# Altium PCB Vesta_cape.PcbDoc (part 2 of 2)
Units mm, origin at the board's own origin, x right, y up, seen from the top; angles counter-clockwise.
Board outline 180 x 109.5 mm, 4 copper layers (Component Side, Ground Plane, Power Plane, Solder Side), stack 1.602 mm thick; 135 components, 158 nets, 582 pads, 796 vias.
Unrouted connection lines stored in the file: 10.
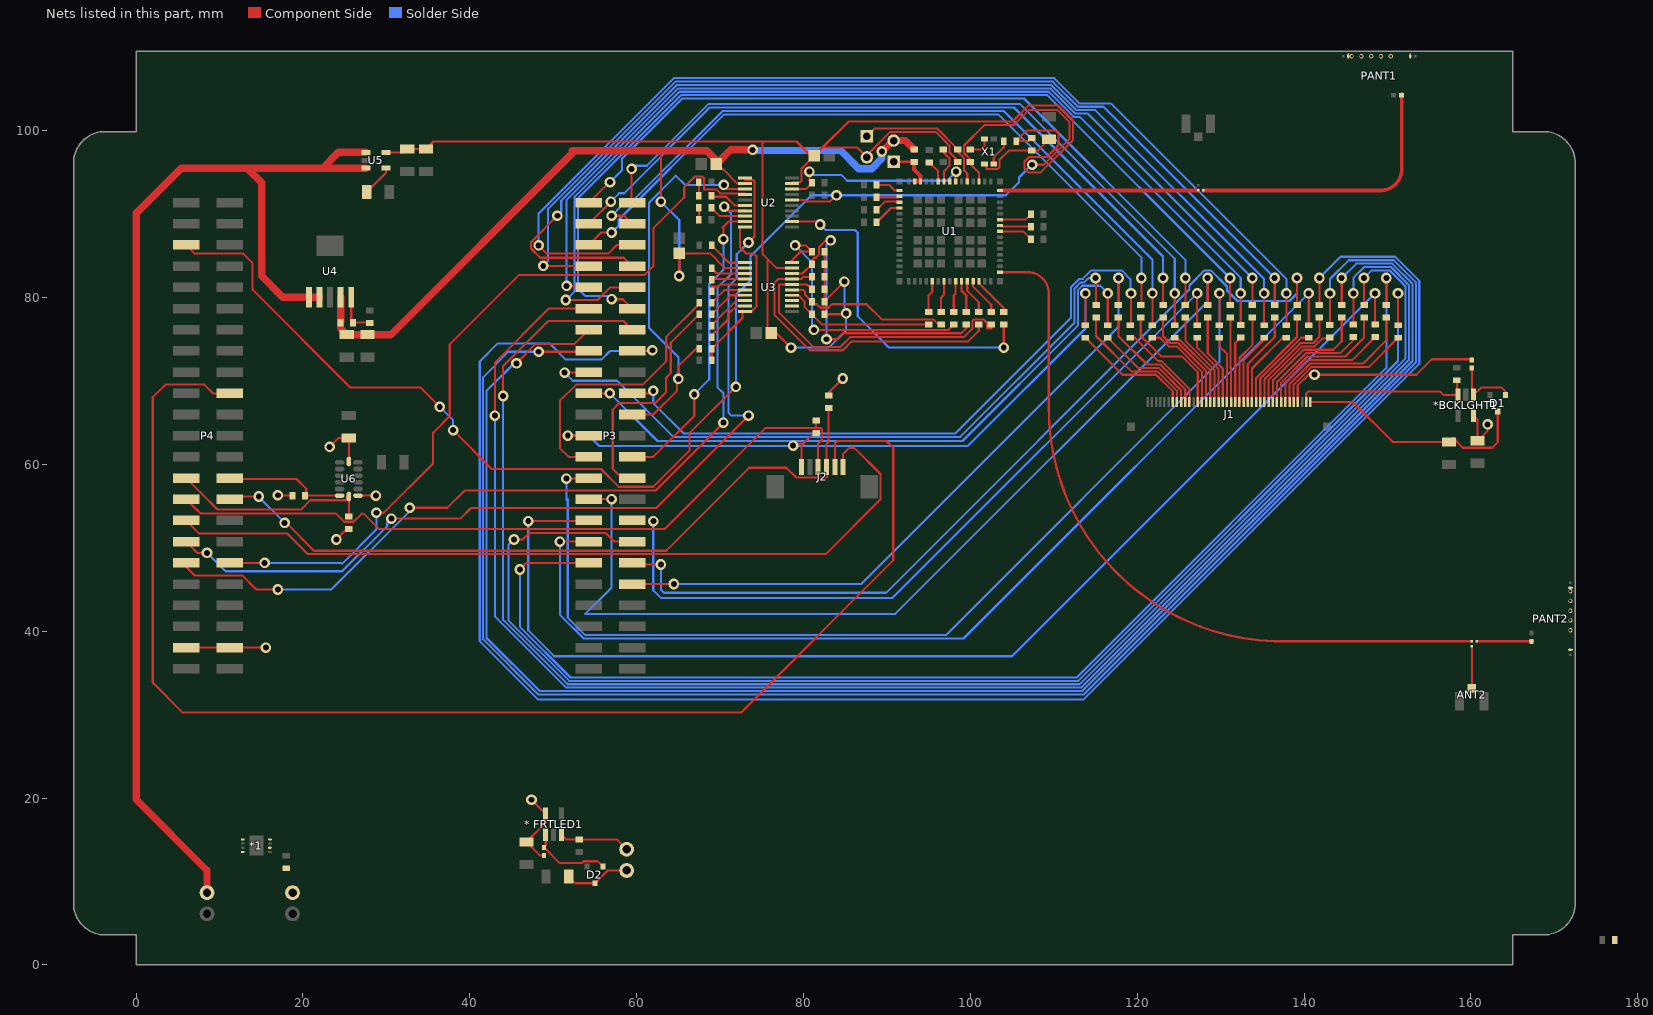
[diagram p4: the nets of this part, all layers, seen from the top]

## Via types
v1: diameter 1.25, hole 0.7, Component Side to Ground Plane, 660 vias
v2: diameter 1.27, hole 0.711, Component Side to Solder Side, 101 vias
v3: diameter 1.27, hole 0.711, Component Side to Ground Plane, 14 vias
v4: diameter 1.27, hole 0.711, Component Side to Power Plane, 10 vias
v5: diameter 0.5, hole 0.3, Component Side to Solder Side, 10 vias
v6: diameter 1.27, hole 0.711, Component Side to Solder Side, tented bottom, 1 vias

## Nets (pads, with @x,y where several pads share a name; then routed paths per layer and width w, separated by ;. In a path a pad name is that pad's centre, name@x,y a point inside that pad or via, vN(x,y) a via of type N, cw(c..) or ccw(c..) an arc to the next point about the centre after c; other vN are vias at no path point) (continued)
GPIO1_12: P4.12 U2.4 | length 94.7
  Component Side w0.254: P4.12@11.205,48.2 v2(15.4,48.2) ; v2(28.8,54.2) 29.7,54.2 35.6,60.1 35.6,63.8 37.6,65.8 37.6,74.393 45.925,82.719 60.976,82.719 62,83.742 62,88.3 65.7,92 65.7,93.245 66.984,94.529 67.916,94.529 68.079,94.366 68.079,92.954 68.104,92.929 69.579,92.929 70.017,92.492 73,92.492 U2.4@73,92.35
  Solder Side w0.254: v2(15.4,48.2) 24.6,48.2 24.7,48.1 28.8,52.2 v2(28.8,54.2)
GPIO1_29: P3.26 R43.1 U2.3 | length 49.2
  Component Side w0.254: P3.26@59.465,65.98 61.98,65.98 64.844,68.844 64.844,70.094 v2(65,70.25) 65,71.77 67.105,73.875 R43.1@67.5,73.875 ; v2@70.454,93.654 v2(70.454,93.497) 70.951,93 U2.3@73,93
  Solder Side w0.254: v2(65,70.25) 65,70.75 65,72.865 61.48,76.385 61.48,91.38 64.7,94.6 65.803,93.497 v2(70.454,93.497)
GPIO1_30: P3.21 R39.1 | length 32.9
  Component Side w0.254: P3.21@54.16,61 P3.21@54.26,60.9 51.85,60.9 50.8,61.95 50.8,67.613 52.749,69.561 60.732,69.561 63.548,72.377 63.548,75.28 R39.1@67.5,79.233
GPIO1_31: P3.20 R40.1 | length 28.2
  Component Side w0.254: P3.20@59.465,58.36 58.221,58.36 57.131,59.45 57.131,66.562 57.922,67.353 62.244,67.353 63.518,68.627 63.518,70.362 64.09,70.935 64.09,74.59 R40.1@67.5,78
I2C1_SCL_TOUCH: J2.3 P4.17 R80.1 | length 89.2
  Component Side w0.254: P4.17@6,55.82 7.284,54.536 7.297,54.536 7.703,54.129 23.925,54.129 24.934,53.121 26.066,53.121 27.045,54.1 27.27,54.1 29.131,52.239 63.339,52.239 75.479,64.379 81.5,64.379 ; R80.1@81.5,65.25 81.5,64.379 ; J2.3@81.75,59.675 81.75,62.5 82.229,62.979 82.229,64.216 82.066,64.379 81.5,64.379
I2C1_SDA_TOUCH: J2.4 P4.18 R79.1 | length 87.2
  Component Side w0.254: P4.18@11.43,56.045 11.538,56.152 v2(14.7,56.152) ; v2(17.8,53) 17.981,53 21.334,49.648 63.548,49.648 73.5,59.6 77.946,59.6 79.1,58.446 82.781,58.446 82.836,58.5 J2.4@82.836,59.675 ; J2.4@82.75,59.675 82.75,62.414 83,62.664 R79.1@83,66.75
  Solder Side w0.254: v2(14.7,56.152) 14.7,56.1 v2(17.8,53)
I2C2_SCL_ACC: P4.19 R77.1 U6.14 | length 24.4
  Component Side w0.254: P4.19@6,58.36 7.691,56.669 7.703,56.669 7.867,56.506 7.867,56.493 9.766,54.594 19.789,54.594 20.891,55.696 25.254,55.696 25.254,56.152 U6.14@25.5,56.152 R77.1@25.5,53.75
I2C2_SDA_ACC: P4.20 R76.1 U6.13 | length 14.8
  Component Side w0.254: P4.20@11.205,58.36 11.205,58.244 19.236,58.244 20.4,57.08 20.4,56.4 R76.1@20.25,56.25 U6.13@24.403,56.25
LCD_DATA0: P3.45 R66.1 | length 91
  Component Side w0.254: P3.45@54.26,91.38 56.712,93.832 v2(56.8,93.832) ; R66.1@125.769,79.097 v2(125.769,82.342) v2@125.769,82.481
  Solder Side w0.254: v2(56.8,93.832) 58.239,95.271 58.239,96.617 65.475,103.853 106.433,103.853 125.769,84.517 v2(125.769,82.342)
LCD_DATA1: P3.46 R67.1 | length 88
  Component Side w0.254: v2(59.4,95.427) 59.4,91.445 P3.46@59.465,91.38 ; R67.1@124.496,76.684 v2(124.496,80.504)
  Solder Side w0.254: v2(59.4,95.427) 59.773,95.8 61.22,95.8 68.597,103.177 105.968,103.177 124.496,84.648 v2(124.496,80.504)
LCD_DATA2: P3.43 R68.1 | length 87.8
  Component Side w0.254: P3.43@54.26,88.84 54.26,88.86 55.931,90.531 55.963,90.531 56.9,91.467 v2(56.9,91.5) ; R68.1@123.092,79.097 v2(123.092,82.342)
  Solder Side w0.254: v2(56.9,91.5) 57.9,92.5 58.495,92.5 68.765,102.77 105.233,102.77 123.092,84.911 v2(123.092,82.342)
LCD_DATA3: P3.44 R69.1 | length 87.6
  Component Side w0.254: v2(57,89.8) 58.505,89.8 P3.44@59.465,88.84 ; R69.1@121.82,76.684 v2@121.82,79.93
  Solder Side w0.254: v2(57,89.8) 58.24,91.04 59,91.04 70.324,102.364 103.996,102.364 121.821,84.54 v2(121.82,80.504)
LCD_DATA4: P3.41 R70.1 | length 86.1
  Component Side w0.254: P3.41@54.26,86.3 55.76,87.8 v2(57,87.8) ; R70.1@120.416,79.097 120.5,79.181 v2(120.5,82.342) v2@120.5,82.5
  Solder Side w0.254: v2(57,87.8) 57.824,88.624 57.824,89.289 70.492,101.958 103.353,101.958 120.5,84.811 v2(120.5,82.342)
LCD_DATA5: P3.42 R57.1 | length 127.6
  Component Side w0.254: v2(48.25,86.25) 49.241,85.259 56.579,85.259 57.62,86.3 P3.42@59.465,86.3 ; R57.1@137.877,76.684 v2@137.877,80.373
  Solder Side w0.254: v2(48.25,86.25) 48.25,90.076 64.465,106.291 110.048,106.291 113.061,103.278 116.834,103.278 137.877,82.235 v2(137.877,80.504)
LCD_DATA6: P3.39 R58.1 | length 119.1
  Component Side w0.254: v2(48.8,83.8) 54.162,83.8 54.231,83.731 P3.39@54.26,83.76 ; R58.1@136.476,79.097 v2(136.476,82.342) v2@136.476,82.476
  Solder Side w0.254: v2(48.8,83.8) 49.394,84.394 49.394,90.645 64.634,105.885 109.879,105.885 112.893,102.871 115.947,102.871 v2(136.476,82.342)
LCD_DATA7: P3.40 R59.1 | length 125.1
  Component Side w0.254: v2(50.5,89.8) 47.336,86.636 47.336,85.871 48.436,84.771 58.454,84.771 P3.40@59.465,83.76 ; R59.1@135.201,76.684 v2@135.201,80.201
  Solder Side w0.254: v2(50.5,89.8) 50.962,90.262 50.962,91.638 64.802,105.478 109.711,105.478 112.724,102.465 114.97,102.465 135.201,82.234 v2(135.201,80.504)
LCD_DATA8: P3.37 R60.1 | length 113.5
  Component Side w0.254: v2(51.6,81.4) 54.08,81.4 P3.37@54.26,81.22 ; R60.1@133.799,79.097 v2(133.799,82.342) v2@133.799,82.451
  Solder Side w0.254: v2(51.6,81.4) 51.6,91.701 64.97,105.072 109.543,105.072 112.556,102.058 114.083,102.058 v2(133.799,82.342)
LCD_DATA9: P3.38 R61.1 | length 121
  Component Side w0.254: v2(51.5,79.7) 55.305,79.7 56.825,81.22 P3.38@59.465,81.22 ; R61.1@132.4,76.7 v2@132.4,80.1
  Solder Side w0.254: v2(51.5,79.7) 52.558,80.758 52.558,92.085 65.139,104.665 109.374,104.665 112.388,101.652 113.106,101.652 132.4,82.358 v2(132.4,80.504)
LCD_DATA10: P3.36 R62.1 | length 114
  Component Side w0.254: v2(57,79.8) 58.345,79.8 P3.36@59.465,78.68 ; R62.1@131.123,79.097 v2(131.123,82.342) v2@131.123,82.377
  Solder Side w0.254: v2(57,79.8) 56.621,80.179 53.829,80.179 52.965,81.043 52.965,91.917 65.307,104.259 109.206,104.259 v2(131.123,82.342)
LCD_DATA11: P3.34 R50.1 | length 194.3
  Component Side w0.254: v2(44,68.2) 44,71.8 49.381,77.181 58.424,77.181 P3.34@59.465,76.14 ; R50.1@147.183,79.097 v2(147.183,82.342) v2@147.183,82.567
  Solder Side w0.254: v2(44,68.2) 44,41.382 51.736,33.646 113.09,33.646 152.171,72.727 152.171,81.324 150.239,83.257 148.098,83.257 v2(147.183,82.342)
LCD_DATA12: P3.35 R51.1 | length 196.3
  Component Side w0.254: v2(43,65.852) 43,72.2 49.48,78.68 P3.35@54.26,78.68 ; R51.1@145.9,76.75 v2@145.9,80.35
  Solder Side w0.254: v2(43,65.852) 43,41.807 51.568,33.239 113.259,33.239 152.578,72.558 152.578,81.492 150.407,83.663 147.211,83.663 145.9,82.352 v2(145.9,80.504)
LCD_DATA13: P3.33 R52.1 | length 197.8
  Component Side w0.254: v2(45.596,72.101) 45.596,72.139 47.906,74.449 52.569,74.449 P3.33@54.26,76.14 ; R52.1@144.506,79.097 v2(144.506,82.342) v2@144.506,82.494
  Solder Side w0.254: v2(45.596,72.101) 45.293,72.101 42,68.808 42,39.2 48.367,32.833 113.427,32.833 152.984,72.39 152.984,81.661 150.575,84.07 146.234,84.07 v2(144.506,82.342)
LCD_DATA14: P3.31 R53.1 | length 203.8
  Component Side w0.254: v2(48.25,73.5) 54.16,73.5 P3.31@54.26,73.6 ; R53.1@143.1,76.7 v2@143.1,80.4
  Solder Side w0.254: v2(48.25,73.5) 44.628,73.5 41.594,70.465 41.594,39.032 48.199,32.427 113.595,32.427 153.391,72.222 153.391,81.829 150.744,84.476 145.347,84.476 143.1,82.229 v2(143.1,80.504)
LCD_DATA15: P3.32 R54.1 | length 218.5
  Component Side w0.254: P3.32@59.465,73.6 61.803,73.6 v2(61.882,73.679) ; R54.1@141.83,79.097 v2(141.83,82.342) v2@141.83,82.42
  Solder Side w0.254: v2(61.882,73.679) 61.803,73.6 56.8,73.6 55.759,72.559 51.498,72.559 49.557,74.5 43.35,74.5 41.187,72.337 41.187,38.813 48.2,31.8 113.544,31.8 153.797,72.053 153.797,81.997 150.912,84.882 144.37,84.882 v2(141.83,82.342)
LCD_DATA16: P3.15 R49.1 | length 145
  Component Side w0.254: v2(47.006,53.2) 54.08,53.2 54.18,53.3 54.23,53.25 P3.15@54.26,53.28 ; R49.1@148.5,76.75 v2@148.5,80.5
  Solder Side w0.254: v2(47.006,53.2) 47.006,40.1 50.108,36.999 104.995,36.999 v2(148.5,80.504)
LCD_DATA17: P3.16 R65.1 | length 92.6
  Component Side w0.254: R65.1@127.172,76.684 v2@127.172,80.328
  Solder Side w0.254: v2(62,53.2) 61.986,53.186 61.986,44.914 62.9,44 90.669,44 v2(127.172,80.504)
LCD_DATA18: P3.11 R48.1 | length 151.4
  Component Side w0.254: v2(46,47.4) 46.8,48.2 P3.11@54.16,48.2 ; R48.1@149.86,79.097 v2(149.86,82.342) v2@149.86,82.39 ; P3.11@54.16,48.2 54.21,48.25 P3.11@54.26,48.2 P3.11@54.16,48.2
  Solder Side w0.254: v2(46,47.4) 46,40.532 52.073,34.459 112.754,34.459 149.86,71.565 v2(149.86,82.342)
LCD_DATA19: P3.12 R56.1 | length 106.9
  Component Side w0.254: P3.12@59.465,48.2 59.265,48 v2(62.9,48) ; R56.1@139.153,79.097 v2(139.153,82.342) v2@139.153,82.347
  Solder Side w0.254: v2(62.9,48) 62.9,45 63.281,44.619 89.904,44.619 126.258,80.972 126.258,81.448 128.067,83.257 128.825,83.257 130.763,81.318 130.763,80.848 132.021,79.589 138.255,79.589 139.153,80.487 v2(139.153,82.342)
LCD_DATA20: P3.17 R64.1 | length 114.4
  Component Side w0.254: P3.17@54.26,55.82 54.276,55.836 v2(57,55.836) ; R64.1@128.446,79.097 v2(128.446,82.342) v2@128.446,82.696
  Solder Side w0.254: v2(57,55.836) 57,45.25 53.829,42.079 91,42.079 128.446,79.524 v2(128.446,82.342)
LCD_DATA21: P3.14 R47.1 | length 162.3
  Component Side w0.254: v2(45.293,51) 46.35,51 47.131,51.781 56.31,51.781 57.351,50.74 P3.14@59.465,50.74 ; R47.1@151.257,76.684 v2@151.257,80.493
  Solder Side w0.254: v2(45.293,51) 44.628,50.335 44.628,41.329 51.905,34.052 112.922,34.052 151.257,72.387 v2(151.257,80.504)
LCD_DATA22: P3.13 R55.1 | length 124
  Component Side w0.254: v2(50.8,50.74) P3.13@54.26,50.74 ; R55.1@140.553,76.684 v2@140.553,80.447
  Solder Side w0.254: v2(50.8,50.74) 50.8,41.993 53.66,39.132 99.181,39.132 v2(140.553,80.504)
LCD_DATA23: P3.19 R63.1 | length 124
  Component Side w0.254: v2(51.568,58.3) 54.2,58.3 P3.19@54.26,58.36 ; R63.1@129.848,76.684 v2@129.848,80.152
  Solder Side w0.254: v2(51.568,58.3) 51.568,55.668 51.736,55.836 51.736,41.631 53.829,39.539 97.084,39.539 129.848,72.303 v2(129.848,80.504)
LCD_DEN: P3.23 R75.1 | length 79
  Component Side w0.254: v2(51.736,63.44) P3.23@54.26,63.44 ; R75.1@113.792,76.684 v2(113.792,80.504)
  Solder Side w0.254: v2(51.736,63.44) 54.26,63.44 55.5,62.2 99.7,62.2 113.792,76.292 v2(113.792,80.504)
LCD_DISP: P3.10 R72.1 | length 80.3
  Component Side w0.254: P3.10@59.465,45.66 v2(64.465,45.66) ; R72.1@117.739,79.097 117.75,79.108 v2(117.75,82.342) v2@117.75,82.5
  Solder Side w0.254: v2(64.465,45.66) 86.91,45.66 117.75,76.5 v2(117.75,82.342)
LCD_HSYNC: P3.27 R73.1 | length 79
  Component Side w0.254: P3.27@54.26,68.52 56.769,68.52 v2(56.774,68.525) ; R73.1@116.468,76.684 v2(116.468,80.504)
  Solder Side w0.254: v2(56.774,68.525) 62.5,62.8 99.05,62.8 112.878,76.628 112.878,80.882 113.413,81.418 115.554,81.418 v2(116.468,80.504)
LCD_LED16V@60MA_NEG: *BCKLGHT1.3 J1.39 R78.2 | length 21.2
  Component Side w0.254: J1.39@140.25,67.5 140.25,68.5 140.5,68.75 156.274,68.75 156.695,68.329 *BCKLGHT1.3@158.425,68.329 158.325,68.428 R78.2@158.325,70.083
LCD_LED16V@60MA_POS: C20.2 D1.3 J1.40 | length 29.1
  Component Side w0.254: J1.40@140.75,67.5 145.8,67.5 150.604,62.696 C20.2@157.37,62.696 157.85,63.176 159.027,61.998 162.544,61.998 163.21,62.664 D1.3@163.21,66.334
LCD_PCLK: P3.28 R71.1 | length 79.1
  Component Side w0.254: P3.28@59.465,68.52 61.697,68.52 v2(61.986,68.808) ; R71.1@119.144,76.684 119.25,76.79 v2(119.25,80.5)
  Solder Side w0.254: v2(61.986,68.808) 61.986,67.347 65.633,63.7 98.2,63.7 112.065,77.565 112.065,81.219 113.077,82.231 113.481,82.231 114.507,83.257 118.129,83.257 119.179,82.206 119.179,80.571 v2(119.25,80.5)
LCD_VSYNC: P3.29 R74.1 | length 83.5
  Component Side w0.254: v2(51.361,71) 54.2,71 P3.29@54.26,71.06 ; v2@115,82.5 115.062,82.438 R74.1@115.062,79.097
  Solder Side w0.254: v2(51.361,71) 52.343,70.019 57.664,70.019 64.389,63.294 98.794,63.294 112.471,76.971 112.471,81.051 113.245,81.825 113.649,81.825 114.167,82.342 v2(115,82.342)
Net*1_2: *1.2 R81.2
Net*1_4: *1.4 J4.2
"Net* FRTLED1_1": "* FRTLED1.1" D2.1 L4.2 | length 9.8
  Component Side w0.254: 49.1,15.6 49.1,14.3 L4.2@48.9,14.1 50.8,12.2 53.405,12.2 53.634,12.429 55.321,12.429 D2.1@55.95,11.8
"Net* FRTLED1_3": "* FRTLED1.3" "front LED1.2" R82.2 | length 8.5
  Component Side w0.254: 51,15.6 51.55,15.05 R82.2@53.1,15.05 57.62,15.05 58.8,13.87
Net*BCKLGHT1_1: *BCKLGHT1.1 D1.1 L3.2 | length 8.3
  Component Side w0.254: L3.2@160.139,71.75 160.139,68.515 *BCKLGHT1.1@160.325,68.329 161.202,69.206 163.674,69.206 164.16,68.719 D1.1@164.16,68.334
NetANT2_1: ANT2.1 C6.2 | length 5.1
  Component Side w0.27: ANT2.1@160.1,33.125 160.122,33.147 C6.2@160.122,38.2
NetC1_2: C1.2 R1.1 X1.4 | length 10.1
  Component Side w0.254: X1.4@101.7,96 101.95,95.75 101.95,95.421 103.316,95.421 103.479,95.584 103.479,96.479 104.614,97.614 107.311,97.614 R1.1@107.339,97.586 ; R1.1@107.368,97.614 108.08,97.614 C1.2@109.433,98.968
NetC2_1: C2.1 C5.2 U1.32 | length 23.8
  Component Side w0.429: U1.32@103.554,92.831 C2.1@127.305,92.831
NetC3_1: C3.1 PANT1.1
  other v5: 145.698,108.924 146.868,108.924 148.038,108.924 149.208,108.924 150.378,108.924
NetC4_1: C4.1 PANT1.2
NetC5_1: C5.1 L1.2 PANT1.3 | length 34.1
  Component Side w0.429: C5.1@127.905,92.831 149.163,92.831 ccw(c149.163,95.371) 151.703,95.371 L1.2@151.703,104.249
NetC6_1: C6.1 C7.2 U1.18 | length 87.8
  Component Side w0.254: U1.18@103.554,83.031 cw(c103.577,83.031) U1.18@103.577,83.054
  Component Side w0.27: U1.18@103.554,83.031 106.86,83.031 cw(c106.86,80.491) 109.4,80.491 109.4,66.737 ccw(c137.337,66.737) 137.337,38.8 C6.1@160.122,38.8
NetC7_1: C7.1 L2.2 PANT2.3 | length 6.5
  Component Side w0.27: C7.1@160.722,38.8 L2.2@167.253,38.8
NetC8_1: C8.1 PANT2.1
  other v5: 171.928,40.125 171.928,41.295 171.928,42.465 171.928,43.635 171.928,44.805
NetC9_1: C9.1 PANT2.2
NetC16_2: C16.2 U5.4 | length 3.8
  Component Side w0.254: C16.2@27.65,92.65 29.95,94.95 U5.4@29.95,95.5
NetC23_2: "front LED1.1" C23.2 D2.3 | length 7.9
  Component Side w0.254: C23.2@51.85,10.6 52.65,9.8 D2.3@55,9.8 56.53,11.33 58.8,11.33
NetJ1_5: J1.36 R47.2 | length 16.9
  Component Side w0.254: J1.36@138.75,67.5 138.75,69.551 140.863,71.664 147.737,71.664 R47.2@151.257,75.184
NetJ1_6: J1.35 R48.2 | length 18.6
  Component Side w0.254: J1.35@138.25,67.5 138.25,69.626 140.718,72.094 147.094,72.094 149.86,74.86 R48.2@149.86,77.597
NetJ1_7: J1.34 R49.2 | length 15.2
  Component Side w0.254: J1.34@137.75,67.5 137.75,69.701 140.549,72.5 145.75,72.5 R49.2@148.5,75.25
NetJ1_8: J1.33 R50.2 | length 16.9
  Component Side w0.254: J1.33@137.25,67.5 137.25,69.775 140.404,72.929 144.929,72.929 147.183,75.183 R50.2@147.183,77.597
NetJ1_9: J1.32 R51.2 | length 13.9
  Component Side w0.254: J1.32@136.75,67.5 136.75,69.85 140.235,73.335 144.335,73.335 145.9,74.9 R51.2@145.9,75.25
NetJ1_10: J1.31 R52.2 | length 15.6
  Component Side w0.254: J1.31@136.25,67.5 136.25,70.063 139.929,73.742 143.492,73.742 144.506,74.756 R52.2@144.506,77.597
NetJ1_11: J1.30 R53.2 | length 12.1
  Component Side w0.254: J1.30@135.75,67.5 135.75,70.138 139.76,74.148 141.287,74.148 142.239,75.1 143,75.1 R53.2@143.1,75.2
NetJ1_12: J1.29 R54.2 | length 13.7
  Component Side w0.254: J1.29@135.25,67.5 135.25,70.213 139.592,74.555 141.118,74.555 141.83,75.266 R54.2@141.83,77.597
NetJ1_13: J1.28 R55.2 | length 10.6
  Component Side w0.254: J1.28@134.75,67.5 134.75,70.287 139.647,75.184 R55.2@140.553,75.184
NetJ1_14: J1.27 R56.2 | length 12.1
  Component Side w0.254: J1.27@134.25,67.5 134.25,70.362 139.153,75.265 R56.2@139.153,77.597
NetJ1_15: J1.26 R57.2 | length 9.7
  Component Side w0.254: J1.26@133.75,67.5 133.75,71.5 137.434,75.184 R57.2@137.877,75.184
NetJ1_16: J1.25 R58.2 | length 11.4
  Component Side w0.254: J1.25@133.25,67.5 133.25,72.038 136.476,75.264 R58.2@136.476,77.597
NetJ1_17: J1.24 R59.2 | length 8.7
  Component Side w0.254: J1.24@132.75,67.5 132.75,72.5 135.201,74.951 R59.2@135.201,75.184
NetJ1_18: J1.23 R60.2 | length 10.7
  Component Side w0.254: J1.23@132.25,67.5 132.25,72.75 133.799,74.299 R60.2@133.799,77.597
NetJ1_19: J1.22 R61.2 | length 8
  Component Side w0.254: J1.22@131.75,67.5 131.75,74.55 R61.2@132.4,75.2
NetJ1_20: J1.21 R62.2 | length 10.1
  Component Side w0.254: R62.2@131.123,77.597 131.156,77.563 131.156,71.594 131.25,71.5 J1.21@131.25,67.5
NetJ1_21: J1.20 R63.2 | length 8.1
  Component Side w0.254: R63.2@129.848,75.184 129.848,74.152 130.75,73.25 J1.20@130.75,67.5
NetJ1_22: J1.19 R64.2 | length 10.8
  Component Side w0.254: R64.2@128.446,77.597 128.446,73.303 130.25,71.498 J1.19@130.25,67.5
NetJ1_23: J1.18 R65.2 | length 8.8
  Component Side w0.254: R65.2@127.172,75.184 127.172,74.001 129.75,71.424 J1.18@129.75,67.5
NetJ1_24: J1.17 R66.2 | length 11.5
  Component Side w0.254: R66.2@125.769,77.597 125.769,74.83 129.25,71.349 J1.17@129.25,67.5
NetJ1_25: J1.16 R67.2 | length 9.6
  Component Side w0.254: R67.2@124.496,75.184 124.719,74.961 125.063,74.961 128.75,71.274 J1.16@128.75,67.5
NetJ1_26: J1.15 R68.2 | length 12.8
  Component Side w0.254: R68.2@123.092,77.597 123.092,75.393 123.931,74.555 124.895,74.555 128.25,71.199 J1.15@128.25,67.5
NetJ1_27: J1.14 R69.2 | length 11.2
  Component Side w0.254: R69.2@121.82,75.184 122.726,75.184 123.762,74.148 124.727,74.148 127.75,71.125 J1.14@127.75,67.5
NetJ1_28: J1.13 R70.2 | length 14.4
  Component Side w0.254: R70.2@120.416,77.597 120.416,75.394 122.859,72.95 125.35,72.95 127.25,71.05 J1.13@127.25,67.5
NetJ1_30: J1.11 R71.2 | length 11.2
  Component Side w0.254: R71.2@119.144,75.184 119.72,75.184 122.528,72.376 122.923,72.376 126.25,69.049 J1.11@126.25,67.5
NetJ1_31: J1.10 R72.2 | length 14.3
  Component Side w0.254: R72.2@117.739,77.597 117.739,75.394 121.164,71.969 122.755,71.969 125.75,68.974 J1.10@125.75,67.5
NetJ1_32: J1.9 R73.2 | length 12.8
  Component Side w0.254: R73.2@116.468,75.184 120.089,71.563 122.587,71.563 125.25,68.899 J1.9@125.25,67.5
NetJ1_33: J1.8 R74.2 | length 15.9
  Component Side w0.254: R74.2@115.062,77.597 115.062,75.395 119.301,71.156 122.418,71.156 124.75,68.825 J1.8@124.75,67.5
NetJ1_34: J1.7 R75.2 | length 14.4
  Component Side w0.254: R75.2@113.792,75.184 118.226,70.75 122.25,70.75 124.25,68.75 J1.7@124.25,67.5
NetP1_1: P1.1 R7.2 U1.38 | length 16.6
  Component Side w0.254: P1.1@87.6,99.34 88.517,100.257 96.013,100.257 98.5,97.77 R7.2@98.5,97.75 98.5,97.445 99.25,96.695 99.25,95.25 99.629,94.871 U1.38@99.629,93.906
NetP2_1: P2.1 R4.2 U1.46 U1.47 | length 5.8
  Component Side w0.254: P2.1@90.804,96.281 93.219,96.281 R4.2@93.219,96.25
  Component Side w0.5: R4.2@93.219,96.25 93.25,96.219 93.25,95.35 94.029,94.571 U1.46@94.029,93.906 U1.47@93.329,93.906
NetR2_1: R2.1 X1.1 | length 3.2
  Component Side w0.254: X1.1@102.8,96 102.8,96.8 104,98 R2.1@104,98.75
NetR3_1: R3.1 X1.3 | length 2.7
  Component Side w0.254: R3.1@100,97.75 101.25,97.75 101.7,98.2 X1.3@101.7,99
NetR5_2: R5.2 U1.43 | length 2.7
  Component Side w0.254: R5.2@95.079,96.175 96.129,95.125 U1.43@96.129,93.906
NetR6_2: R6.2 U1.42 | length 4.4
  Component Side w0.254: R6.2@96.75,97.75 96.75,97.445 97.479,96.716 97.479,95.784 96.829,95.134 U1.42@96.829,93.906
NetR8_2: R8.2 U1.41
NetR9_2: R9.2 U1.50 | length 3
  Component Side w0.254: R9.2@88.75,93.5 90.25,93.5 90.919,92.831 U1.50@91.504,92.831
NetR10_2: R10.2 U1.51 | length 2.8
  Component Side w0.254: R10.2@88.75,92 91.373,92 U1.51@91.504,92.131
NetR11_2: R11.2 U1.52 | length 3.2
  Component Side w0.254: R11.2@88.75,90.5 89.75,91.5 91.435,91.5 U1.52@91.504,91.431
NetR12_2: R12.2 U1.53 | length 3.5
  Component Side w0.254: R12.2@88.75,89 90.481,90.731 U1.53@91.504,90.731
NetR13_2: R13.2 U1.27 | length 4
  Component Side w0.254: U1.27@103.554,89.331 106.581,89.331 R13.2@107.25,90
NetR14_2: R14.2 U1.26 | length 3.8
  Component Side w0.254: U1.26@103.554,88.631 103.685,88.5 R14.2@107.25,88.5
NetR15_2: R15.2 U1.25 | length 4.1
  Component Side w0.254: U1.25@103.554,87.931 106.319,87.931 R15.2@107.25,87
NetR16_1: R16.1 U1.14 | length 5
  Component Side w0.254: U1.14@101.029,81.956 101.029,81.686 101.413,81.302 101.448,81.302 104,78.75 R16.1@104,78.25
NetR17_2: R17.2 U1.6 | length 3.9
  Component Side w0.254: R17.2@95,78.25 95,80.25 95.429,80.679 U1.6@95.429,81.956
NetR18_1: R18.1 U1.13 | length 4.6
  Component Side w0.254: U1.13@100.329,81.956 100.329,81.3 102.5,79.129 R18.1@102.5,78.25
NetR19_1: R19.1 U1.12 | length 4.3
  Component Side w0.254: U1.12@99.629,81.956 99.629,80.796 101,79.425 R19.1@101,78.25
NetR20_2: R20.2 U1.8 | length 3.8
  Component Side w0.254: R20.2@96.5,78.25 96.5,80 96.829,80.329 U1.8@96.829,81.956
NetR21_1: R21.1 U1.11 | length 3.9
  Component Side w0.254: U1.11@98.929,81.956 98.929,80.821 99.5,80.25 R21.1@99.5,78.25
NetR22_1: R22.1 U1.10 | length 3.8
  Component Side w0.254: R22.1@98,78.25 98,80.25 98.229,80.479 U1.10@98.229,81.956
NetR23_2: R23.2 U2.6 | length 4.5
  Component Side w0.254: R23.2@69.05,92.2 69.05,92.086 70.714,92.086 71.75,91.05 U2.6@73,91.05
NetR24_2: R24.2 U2.8 | length 4.5
  Component Side w0.254: R24.2@68.95,90.75 69.95,89.75 U2.8@73,89.75
NetR35_2: R35.2 U3.1 | length 4.5
  Component Side w0.254: R35.2@69,86.25 71.075,84.175 U3.1@72.681,84.175
NetR36_2: R36.2 U3.3 | length 3.9
  Component Side w0.254: R36.2@69,83.5 69.625,82.875 U3.3@72.681,82.875
NetR37_2: R37.2 U3.4 | length 3.7
  Component Side w0.254: R37.2@69,82.25 69.025,82.225 U3.4@72.681,82.225
NetR38_2: R38.2 U3.5 | length 4.4
  Component Side w0.254: R38.2@69,80.75 69,81.331 69.756,81.331 70,81.575 U3.5@72.681,81.575
NetR39_2: R39.2 U3.6 | length 4.4
  Component Side w0.254: R39.2@69,79.375 70.5,80.875 70.5,80.925 U3.6@72.681,80.925
NetR40_2: R40.2 U3.7 | length 4.6
  Component Side w0.254: R40.2@69,78 71.275,80.275 U3.7@72.681,80.275
NetR41_2: R41.2 U3.8 | length 5.1
  Component Side w0.254: R41.2@69,76.625 69,77 69.294,77 71.919,79.625 U3.8@72.681,79.625
NetR42_2: R42.2 U3.9 | length 5.7
  Component Side w0.254: R42.2@69,75.25 69,75.5 69.396,75.896 69.466,75.896 71,77.43 71,78.056 71.919,78.975 U3.9@72.681,78.975
NetR43_2: R43.2 R44.2 U2.10 U3.10 | length 20
  Component Side w0.254: R44.2@69,72.5 R43.2@69,73.875 72.681,77.556 72.681,78.325 U3.10@73,78.325 73.761,78.325 74.35,78.914 74.35,84.95 74,85.3 73.105,85.3 72.405,86 U2.10@72.405,88.317
NetR45_1: R45.1 R46.2 U4.5 | length 5.2
  Component Side w0.254: U4.5@25.79,80.05 25.79,77.21 R45.1@26,77 27.95,77 R46.2@28,76.95
RESERVED1: U3.13
RESERVED2: U3.12
SDIO_CLK: R20.1 R33.1 U3.15 | length 20.5
  Component Side w0.254: U3.15@78.319,80.925 U3.15@78.639,80.925 79.95,80.925 80.196,80.679 80.196,80.304 R33.1@81,79.5 81.3,79.2 81.605,79.2 82.034,78.771 82.966,78.771 83.395,79.2 87.55,79.2 89.371,77.379 95.566,77.379 96.195,76.75 R20.1@96.5,76.75
SDIO_CMD: R17.1 R34.1 U3.14 | length 18.5
  Component Side w0.254: U3.14@78.319,80.275 U3.14@78.639,80.275 79.4,80.275 80.1,79.575 80.1,78.9 R34.1@81,78 82.25,76.75 R17.1@95,76.75
SDIO_D0: R22.2 R29.1 U3.20 | length 33.6
  Component Side w0.254: U3.20@78.319,84.175 79.644,85.5 R29.1@81,85.5 80.25,86.25 v2(79,86.25) ; v2(81.244,76.121) 97.371,76.121 R22.2@98,76.75
  Solder Side w0.254: v2(79,86.25) 81,84.25 81,76.364 v2(81.244,76.121)
SDIO_D1: R21.2 R30.1 U3.18 | length 37.2
  Component Side w0.254: U3.18@78.319,82.875 U3.18@78.639,82.875 79.875,82.875 R30.1@81,84 81,84.5 81.271,84.771 81.466,84.771 81.871,85.175 81.871,86.066 82.658,86.853 v2(83.25,86.853) ; v2(82.75,75) 84,75 84.714,75.714 98.886,75.714 99.5,76.328 R21.2@99.5,76.75
  Solder Side w0.254: v2(82.75,75) 82.75,86.353 v2(83.25,86.853)
SDIO_D2: R19.2 R31.1 U3.17 | length 36.6
  Component Side w0.254: R31.1@81,82.5 81,82.469 79.969,82.469 79.725,82.225 U3.17@78.639,82.225 76.975,82.225 76.5,81.75 76.5,77.945 80.766,73.679 84.729,73.679 85.8,74.75 99.75,74.75 101,76 R19.2@101,76.75
SDIO_D3: R18.2 R32.1 U3.16 | length 37.9
  Component Side w0.254: R32.1@81,81 80.425,81.575 U3.16@78.639,81.575 77.075,81.575 77.075,78.158 81.148,74.086 84.436,74.086 85.6,75.25 99.195,75.25 100.271,76.325 100.271,77.216 100.434,77.379 101.566,77.379 101.997,76.948 101.997,76.273 102.5,76.273 R18.2@102.5,76.75
SLOW_CLK: P4.41 R3.2 U1.36 U2.16 | length 175.2
  Component Side w0.254: P4.41@6,86.3 7.041,85.259 12.843,85.259 13.975,84.126 13.975,80.925 25.7,69.2 34.1,69.2 v2(36.4,66.9) ; v2(38,64.1) 42.648,59.452 55.72,59.452 57.854,57.319 61.994,57.319 66.319,61.644 66.319,63.719 v2(71.9,69.3) ; U2.16@78.639,91.7 80.121,91.7 80.3,91.521 83.221,91.521 v2(83.953,92.253) ; U1.36@101.029,93.906 101.029,94.971 100,96 R3.2@100,96.25 100,96.555 99.229,97.325 99.229,98.216 101.714,100.7 105.264,100.7 106.827,102.263 106.854,102.263 107.088,102.497 110.399,102.497 111.9,100.996 111.9,99.031 108.787,95.918 v2(107.407,95.918)
  Solder Side w0.254: v2(36.4,66.9) 38,65.3 v2(38,64.1) ; v2(71.9,69.3) 71.9,80.3 73.65,82.05 73.65,84.95 80.953,92.253 v2(83.953,92.253) 104.253,92.253 105.832,93.832 105.832,94.382 107.368,95.918 v2(107.407,95.918)
TOUCH_INT: J2.5 P4.28 | length 166
  Component Side w0.254: P4.28@11.205,68.52 9.227,68.52 8.186,69.561 3.512,69.561 2,68.049 2,33.85 5.6,30.25 72.5,30.25 90.75,48.5 90.75,62 89.95,62.8 84.05,62.8 83.75,62.5 J2.5@83.75,59.675
TOUCH_WAKE: J2.6 P4.15 | length 98.3
  Component Side w0.254: P4.15@6,53.28 6,53.25 7.55,51.7 18.14,51.7 20.599,49.241 82.662,49.241 89.229,55.809 89.229,58.841 86.07,62 85.5,62 84.75,61.25 J2.6@84.75,59.675
UART4_CTSN: R23.1 R25.2 | length 1.6
  Component Side w0.254: R23.1@67.45,92.2 R25.2@67.45,93.8
UART4_RTSN: R24.1 R26.2 | length 1.5
  Component Side w0.254: R26.2@67.45,89.3 R24.1@67.45,90.75
UART4_TXD: P4.13 U2.1 | length 110
  Component Side w0.254: P4.13@6,50.6 P4.13@6,50.74 6.9,49.84 6.9,49.8 7.3,49.4 v2(8.5,49.4) ; v2(30.6,53.5) 38.861,53.5 40.14,54.779 62.327,54.779 v2(73.4,65.852) ; U2.1@73,94.3 73,94.107 73.954,94.107 74.118,93.944 74.118,87.318 v2(73.4,86.6)
  Solder Side w0.254: v2(8.5,49.4) 10.714,47.186 24.686,47.186 30.1,52.6 30.1,53 v2(30.6,53.5) ; v2(73.4,65.852) 71.348,65.852 70.986,66.214 70.986,81.286 72,82.3 72,85.2 v2(73.4,86.6)
URAT_4RXD: P4.11 U2.7 | length 104.5
  Component Side w0.254: P4.11@6,48.2 6,47.7 6.999,46.701 12.716,46.701 14.418,45 v2(17,45) ; v2(32.8,54.8) 37.3,54.8 39.361,56.861 62.261,56.861 v2(70.4,65) ; v2(70.5,90.9) 71,90.4 U2.7@73,90.4
  Solder Side w0.254: v2(17,45) 23.4,45 32.8,54.4 v2(32.8,54.8) ; v2(70.4,65) 70.4,68.525 69.675,69.251 69.675,81.16 71.314,82.8 71.314,90.086 v2(70.5,90.9)
VCC: "* FRTLED1.5" *BCKLGHT1.5 C19.2 C21.2 C24.2 J1.37 J2.1 L3.1 L4.1 P4.3 P4.4 R76.2 R77.2 R79.2 R80.2 U6.1 U6.7 | length 69.9
  Component Side w0.254: P4.3@6,38.04 P4.4@11.205,38.04 v4(15.56,38.04) ; v4(17,56.3) 16.995,56.3 16.847,56.152 17,56 17.25,56.25 R76.2@18.75,56.25 ; v4(23.2,62.1) 24.25,63.15 C19.2@25.5,63.15 U6.7@25.5,60.347 ; v4(24,51) 25.25,52.25 R77.2@25.5,52.25 ; U6.1@26.598,56.25 v4(28.75,56.25) ; v4(47.4,19.8) 49.1,18.1 49.1,17.05 C24.2@46.8,14.75 48.45,13.1 L4.1@48.9,13.1 ; v4(78.75,62.25) 79,62.5 80,62.5 ; J2.1@79.75,59.675 79.75,62.25 80,62.5 ; R80.2@81.219,63.719 80,62.5 ; R80.2@81.344,63.594 R80.2@81.5,63.75 ; R79.2@83,68.25 83,68.6 v4(84.7,70.3) ; J1.37@139.25,67.5 139.244,67.506 139.244,69.47 140.524,70.75 v4(141.25,70.75) 153.459,70.75 155.316,72.607 159.996,72.607 L3.1@160.139,72.75 ; *BCKLGHT1.5@160.325,65.829 160.798,65.355 C21.2@160.798,62.828 162,64.029 v4(162,64.8)
VDD_1V8_WIFI: C10.1 C12.1 C17.2 C18.2 P1.2 R1.2 R2.2 R7.1 R29.2 R30.2 R31.2 R32.2 R33.2 R34.2 U2.19 U3.19 U5.5 | length 191.3
  Component Side w0.254: U5.5@29.95,97.4 32.1,97.4 C17.2@32.5,97.8 C18.2@34.7,97.8 ; C18.2@34.75,97.8 35.65,98.7 74.2,98.7 75.3,98.7 ; U3.19@78.319,83.525 76.775,83.525 75.7,84.6 ; v2(78.5,74) 76.75,75.75 C12.1@76.15,75.75 75.7,76.2 75.7,84.6 ; U2.19@78.639,93.65 78.639,93.843 79.593,93.843 79.756,94.006 79.756,95.456 C10.1@81.3,97 82.279,97.979 ; C10.1@81.075,96.775 79.15,98.7 75.3,98.7 ; R34.2@82.5,78 85,78 v2(85.1,78.1) ; R29.2@82.5,85.5 R30.2@82.5,84 R31.2@82.5,82.5 R32.2@82.5,81 R33.2@82.5,79.5 v2(84.9,81.9) ; R7.1@98.5,96.25 98.5,96.425 97.479,97.446 97.479,98.216 95.845,99.85 90.378,99.85 87.6,97.073 P1.2@87.6,96.8 86.421,97.979 82.279,97.979 ; R2.2@105.5,98.75 105.877,98.75 ; R1.2@107.212,98.959 107.003,98.75 105.877,98.75 ; 75.3,98.7 75.1,98.5 75.1,85.2 75.7,84.6 ; 82.279,97.979 85.406,101.106 105.053,101.106 106.949,103.002 110.569,103.002 112.306,101.265 112.306,98.863 108.448,95.004 106.954,95.004 106.493,95.465 106.493,96.297 107.029,96.833 109.127,96.833 110.563,98.269 110.563,99.633 110.156,100.04 106.769,100.04 105.877,99.149 105.877,98.75
  Solder Side w0.254: v2(78.5,74) 83.043,74 85.1,76.057 v2(85.1,78.1) 84.9,78.3 v2(84.9,81.9)
VDD_3V3_WIFI: C11.2 C13.2 C14.2 C15.2 P2.2 R4.1 R45.2 U2.2 U3.2 U4.4 | length 117.9
  Component Side w0.254: R45.2@24.5,77 R45.2@24.52,77.02 ; 62.8,97.6 62.9,97.5 v2(62.9,91.5) ; v2(65.1,82.585) C13.2@65.1,85.3 68.8,85.3 70.575,83.525 U3.2@72.681,83.525 ; C11.2@69.55,96 C11.2@69.7,96.15 ; 70.269,95.456 70.366,95.359 72.075,93.65 U2.2@73,93.65 ; P2.2@90.721,98.821 P2.2@90.804,98.821
  Component Side w0.889: R45.2@24.5,77 24.5,76.3 C14.2@25.25,75.55 C15.2@27.75,75.55 30.55,75.55 52.3,97.3 52.3,97.6 62.8,97.6 68.394,97.6 69.7,96.294 69.7,96.15 71.25,97.7 v2(73.9,97.7) ; R45.2@24.52,77.02 U4.4@24.52,80.05 ; v2(89.4,97.5) P2.2@90.721,98.821 ; P2.2@90.804,98.821 92.179,98.821 R4.1@93.25,97.75
  Solder Side w0.254: v2(62.9,91.5) 65.1,89.3 v2(65.1,82.585) ; v2(73.9,97.7) 74,97.6 74.518,97.6 74.538,97.619 ; v2@89.071,97.829 v2(89.4,97.5)
  Solder Side w0.889: 74.538,97.619 84.447,97.619 86.613,95.453 88.158,95.453 89.4,96.695 v2(89.4,97.5)
"VDD_BAT (3.7-4.2V)": *1.5 *1.8 J3.1 U4.1 U4.2 U5.1 U5.3 | length 142.3
  Component Side w0.889: J3.1@8.5,8.67 8.5,9.257 8.5,11.33 0,19.83 0,90.1 5.4,95.5 13.3,95.5 ; U4.2@21.98,80.05 U4.1@20.71,80.05 17.6,80.05 15.064,82.585 15.064,93.735 13.3,95.5 ; U5.3@27.55,95.5 22.35,95.5 ; U5.1@27.55,97.4 24.25,97.4 22.35,95.5 ; 13.3,95.5 22.35,95.5
WL_EN: R27.2 U1.40 U2.18 | length 23.9
  Component Side w0.254: U2.18@78.639,93 80.25,93 R27.2@81,93.75 80.7,94.05 v2(80.7,95.1) ; U1.40@98.229,93.906 98.229,95.029 v2(98.3,95.1)
  Solder Side w0.254: v2(80.7,95.1) 81.1,94.7 84.524,94.7 85.231,93.994 97.194,93.994 v2(98.3,95.1)
WL_IRQ: R16.2 U2.12 | length 40.2
  Component Side w0.254: U2.12@78.639,89.1 81.65,89.1 v2(82,88.75) ; v2(104,74) R16.2@104,76.75
  Solder Side w0.254: v2(82,88.75) 82.65,88.1 86.168,88.1 86.5,87.768 86.5,77.75 90.25,74 v2(104,74)
WL_IRQ_OUT: P3.22 U2.9 | length 36.5
  Component Side w0.254: P3.22@59.465,60.9 62,60.9 66.9,65.8 v2(66.9,68.4) ; v2(70.4,87) 70.4,88.3 70.3,88.4 71,89.1 U2.9@73,89.1
  Solder Side w0.254: v2(66.9,68.4) 68.7,70.2 68.7,81.625 70.4,83.325 v2(70.4,87)
pads on no net: *1.6 *1.7 *1.9 D1.2 D2.2 J1.1 J1.2 J1.3 J1.4 J1.6 J1.MP1 J1.MP2 J2.MP1 J2.MP2 P3.3 P3.4 P3.7 P3.8 P3.18 P3.30 P4.5 P4.6 P4.7 P4.8 P4.9 P4.10 P4.14 P4.16 P4.21 P4.22 P4.24 P4.26 P4.32 P4.33 P4.34 P4.35 P4.36 P4.37 P4.38 P4.39 P4.40 P4.42 P4.43 P4.44 P4.45 P4.46 R5.1 R6.1 R13.1 R14.1 R15.1 R41.1 R42.1 U1.2 U1.3 U1.4 U1.5 U1.21 U1.22 U1.56 U1.57 U1.58 U1.60 U1.62 U6.3 U6.10 U6.11

## Polygon pours and split planes (outlines as drawn)
GND on Component Side "Component Side-No Net" (solid, remove dead copper, shelved, pour order 3): -4.314,3.65 0,3.65 0,0 165,0 165,3.65 169.315,3.65 ccw(c168.7,7.4) 172.5,7.4 172.5,96.092 ccw(c168.7,96.1) 169.314,99.85 165,99.85 165,109.5 0,109.5 0,99.85 -4.314,99.85 ccw(c-3.7,96.1) -7.5,96.1 -7.5,7.4 ccw(c-3.7,7.4)
GND on Ground Plane (split plane): 164.49,99.85 164.499,99.75 164.528,99.655 164.576,99.566 164.639,99.489 164.716,99.426 164.805,99.378 164.901,99.349 165,99.34 169.259,99.34 169.724,99.237 170.198,99.04 170.64,98.77 171.033,98.433 171.37,98.04 171.64,97.598 171.838,97.12 171.959,96.616 172.001,96.08 171.995,45.5 167.503,45.5 167.503,37.5 171.994,37.5 171.99,7.415 171.958,6.879 171.838,6.38 171.64,5.902 171.37,5.46 171.033,5.067 170.64,4.73 170.198,4.46 169.72,4.262 169.256,4.151 165.001,4.16 165,4.16 164.951,4.156 164.902,4.151 164.901,4.151 164.853,4.136 164.806,4.122 164.805,4.122 164.761,4.098 164.717,4.075 164.716,4.074 164.678,4.043 164.64,4.012 164.64,4.011 164.639,4.011 164.608,3.973 164.576,3.935 164.576,3.934 164.552,3.89 164.529,3.846 164.528,3.845 164.514,3.798 164.5,3.751 164.5,3.75 164.499,3.75 164.495,3.7 164.49,3.651 164.49,3.65 164.49,0.51 0.51,0.51 0.51,3.65 0.501,3.75 0.472,3.845 0.424,3.934 0.361,4.011 0.284,4.074 0.195,4.122 0.1,4.151 0,4.16 -4.259,4.16 -4.724,4.264 -5.198,4.46 -5.64,4.73 -6.033,5.067 -6.37,5.46 -6.64,5.902 -6.838,6.38 -6.959,6.884 -7.001,7.42 -6.99,96.085 -6.958,96.621 -6.838,97.12 -6.64,97.598 -6.37,98.04 -6.033,98.433 -5.64,98.77 -5.198,99.04 -4.72,99.238 -4.256,99.35 -0.001,99.34 0,99.34 0.049,99.344 0.098,99.349 0.099,99.349 0.1,99.349 0.147,99.364 0.194,99.378 0.195,99.378 0.239,99.402 0.283,99.425 0.284,99.426 0.322,99.457 0.36,99.488 0.36,99.489 0.361,99.489 0.392,99.527 0.424,99.565 0.424,99.566 0.448,99.61 0.471,99.654 0.472,99.655 0.486,99.702 0.5,99.749 0.5,99.75 0.501,99.75 0.505,99.799 0.51,99.849 0.51,99.85 0.51,108.99 145.003,108.99 145.003,104.499 153.003,104.499 153.003,108.99 164.49,108.99
VCC on Power Plane (split plane): 164.49,99.85 164.499,99.75 164.528,99.655 164.576,99.566 164.639,99.489 164.716,99.426 164.805,99.378 164.901,99.349 165,99.34 169.259,99.34 169.724,99.237 170.198,99.04 170.64,98.77 171.033,98.433 171.37,98.04 171.64,97.598 171.838,97.12 171.959,96.616 172.001,96.08 171.995,45.5 167.503,45.5 167.503,37.5 171.994,37.5 171.99,7.415 171.958,6.879 171.838,6.38 171.64,5.902 171.37,5.46 171.033,5.067 170.64,4.73 170.198,4.46 169.72,4.262 169.256,4.151 165.001,4.16 165,4.16 164.951,4.156 164.902,4.151 164.901,4.151 164.853,4.136 164.806,4.122 164.805,4.122 164.761,4.098 164.717,4.075 164.716,4.074 164.678,4.043 164.64,4.012 164.64,4.011 164.639,4.011 164.608,3.973 164.576,3.935 164.576,3.934 164.552,3.89 164.529,3.846 164.528,3.845 164.514,3.798 164.5,3.751 164.5,3.75 164.499,3.75 164.495,3.7 164.49,3.651 164.49,3.65 164.49,0.51 0.51,0.51 0.51,3.65 0.501,3.75 0.472,3.845 0.424,3.934 0.361,4.011 0.284,4.074 0.195,4.122 0.1,4.151 0,4.16 -4.259,4.16 -4.724,4.264 -5.198,4.46 -5.64,4.73 -6.033,5.067 -6.37,5.46 -6.64,5.902 -6.838,6.38 -6.959,6.884 -7.001,7.42 -6.99,96.085 -6.958,96.621 -6.838,97.12 -6.64,97.598 -6.37,98.04 -6.033,98.433 -5.64,98.77 -5.198,99.04 -4.72,99.238 -4.256,99.35 -0.001,99.34 0,99.34 0.049,99.344 0.098,99.349 0.099,99.349 0.1,99.349 0.147,99.364 0.194,99.378 0.195,99.378 0.239,99.402 0.283,99.425 0.284,99.426 0.322,99.457 0.36,99.488 0.36,99.489 0.361,99.489 0.392,99.527 0.424,99.565 0.424,99.566 0.448,99.61 0.471,99.654 0.472,99.655 0.486,99.702 0.5,99.749 0.5,99.75 0.501,99.75 0.505,99.799 0.51,99.849 0.51,99.85 0.51,108.99 145.003,108.99 145.003,104.499 153.003,104.499 153.003,108.99 164.49,108.99

## Other copper
Component Side:
  rectangle net GND: 93.1,88.45 97,92.375
  rectangle net GND: 98,88.45 101.95,92.35
  rectangle net GND: 98,83.5 101.95,87.423
  rectangle net GND: 93.1,83.5 97,87.4

## Silkscreen, mask and mechanical layers (free items; w line width, h text height)
Mechanical 1:
  drawing of 527 lines, arcs and shapes, not listed
  text "Layer" at 204.307,101.801 h1.52
  text "Name" at 214.718,101.801 h1.52
  text "Material" at 238.588,101.801 h1.52
  text "Thickness" at 260.426,101.801 h1.52
  text "Constant" at 276.932,101.801 h1.52
  text "Board Layer Stack" at 291.406,101.801 h1.52
  text "1" at 204.307,98.753 h1.52
  text "Top Overlay" at 214.718,98.753 h1.52
  text "2" at 204.307,95.705 h1.52
  text "Top Solder" at 214.718,95.705 h1.52
  text "Solder Resist" at 238.588,95.705 h1.52
  text "0,40mil" at 260.426,95.705 h1.52
  text "3,5" at 276.932,95.705 h1.52
  text "UP" at 88,94 h1.52
  text "3" at 204.307,92.657 h1.52
  text "Component Side" at 214.718,92.657 h1.52
  text "Copper" at 238.588,92.657 h1.52
  text "1,40mil" at 260.426,92.657 h1.52
  text "P8_45" at 45.25,90.75 h1.52
  text "4" at 204.307,89.609 h1.52
  text "Dielectric 1" at 214.718,89.609 h1.52
  text "FR-4" at 238.588,89.609 h1.52
  text "12,60mil" at 260.426,89.609 h1.52
  text "4,8" at 276.932,89.609 h1.52
  text "5" at 204.307,86.561 h1.52
  text "Ground Plane" at 214.718,86.561 h1.52
  text "Copper" at 238.588,86.561 h1.52
  text "1,42mil" at 260.426,86.561 h1.52
  text "6" at 204.307,83.513 h1.52
  text "Dielectric 3" at 214.718,83.513 h1.52
  text "5,00mil" at 260.426,83.513 h1.52
  text "4,2" at 276.932,83.513 h1.52
  text "7" at 204.307,80.465 h1.52
  text "Power Plane" at 214.718,80.465 h1.52
  text "Copper" at 238.588,80.465 h1.52
  text "1,42mil" at 260.426,80.465 h1.52
  text "8" at 204.307,77.417 h1.52
  text "Dielectric 4" at 214.718,77.417 h1.52
  text "10,00mil" at 260.426,77.417 h1.52
  text "4,2" at 276.932,77.417 h1.52
  text "9" at 204.307,74.369 h1.52
  text "Solder Side" at 214.718,74.369 h1.52
  text "Copper" at 238.588,74.369 h1.52
  text "1,40mil" at 260.426,74.369 h1.52
  text "10" at 204.307,71.321 h1.52
  text "Bottom Solder" at 214.718,71.321 h1.52
  text "Solder Resist" at 238.588,71.321 h1.52
  text "0,40mil" at 260.426,71.321 h1.52
  text "3,5" at 276.932,71.321 h1.52
  text "11" at 204.307,68.273 h1.52
  text "Bottom Overlay" at 214.718,68.273 h1.52
  text "Pin 1" at 144.5,65.5 h1.52
  text "P8_2" at 59,34.75 h1.52

## Dimensions
-3.7,97.8 to 0,99.85 on Mechanical 1
-7.404,110.168 to 172.596,106.168 on Mechanical 1
165,92.35 to 165,11.15 on Mechanical 1
-1.95,96.1 to -107.506,-61.006 on Mechanical 1
0,0 to 0,109.5 on Mechanical 1
165,3.65 to 165,0 on Mechanical 1